# Allegro board pedal.brd
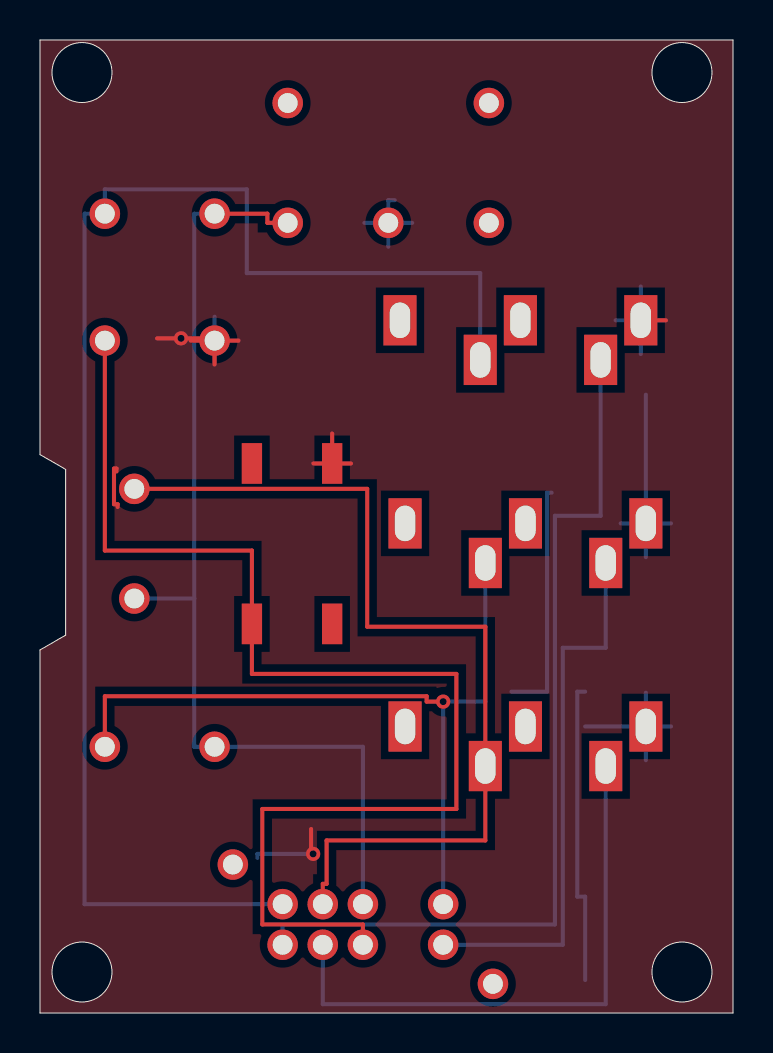
[diagram p0: board, top side]
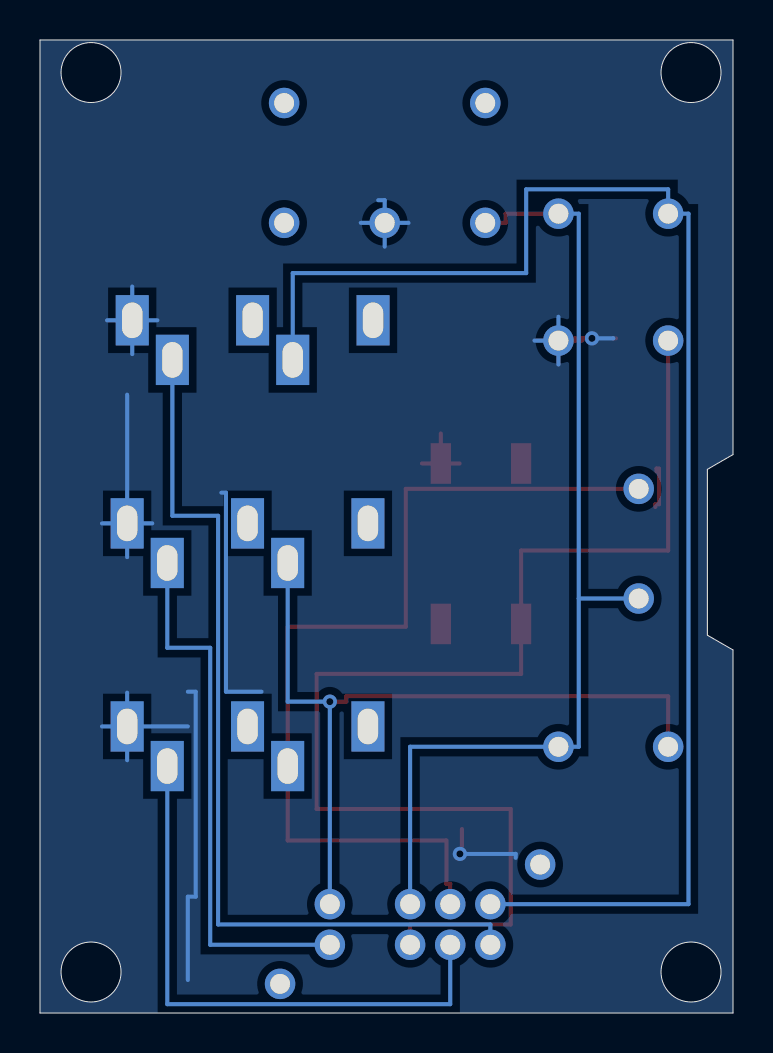
[diagram p1: board, bottom side, seen from below]

Outline 34.65 x 48.68 mm; copper layers: TOP, BOTTOM. Coordinates in mm from the lower left corner of the outline.
Outline path: circle c2.1,47.05 r1.5 ; circle c2.1,2.05 r1.5 ; circle c32.1,47.05 r1.5 ; circle c32.1,2.05 r1.5 ; 0,48.68 34.65,48.68 34.65,0 0,0 0,18.17 1.28,18.91 1.28,27.2 0,27.94 0,48.68

## Placement (name value [footprint] x y rotation side)
C52  104  [CAPCITA2P]  5.99 33.64 0 top
C53  104  [CAPCITA2P]  5.99 13.32 0 top
C54  104  [CAPCITA2P]  5.99 39.99 0 top
C55  104  [CAPCITA2P]  4.72 23.48 270 top
U1  switch_3b  [SWITCH_3P]  16.15 4.43 270 top
U2  pot_3pin  [PET_3P]  17.42 42.53 90 top
U3  aduio_3.5  [AUDIO_3]  24.27 23.48 270 top
U4  aduio_3.5  [AUDIO_3]  24.27 13.32 270 top
U5  aduio_3.5  [AUDIO_3]  24.02 33.64 270 top
U6  switch4p  [BUTOM4P]  12.6 23.48 90 top

## Library data of the parts
C52-C55 = CAP NP
U1 = switch_3b
U2 = pot_3pin
U3-U5 = aduio_3.5
U6 = switch4p

## Footprints (pads in the part's own frame, mm; a bottom-side part is the same pattern mirrored in y, then rotated)
AUDIO_3
  rect 2.515x1.651 hole 1.778x1.016: 1(-1.016,6.02) 2(-1.016,0) 3(-1.016,-6.02) 4(0.965,4.013) 5(0.965,-2.007)
BUTOM4P
  rect 2.032x1.016 smd: 1(-4.013,2.007) 2(-4.013,-2.007) 3(4.013,-2.007) 4(4.013,2.007)
CAPCITA2P
  round 1.524 hole 0.991: 1(-2.743,0) 2(2.743,0)
PET_3P
  round 1.524 hole 0.991: 1(-2.997,5.029) 2(-2.997,0) 3(-2.997,-5.029) 4(2.997,-5.029) 5(2.997,5.029)
SWITCH_3P
  round 1.524 hole 0.991: 1(-1.016,4.013) 2(-1.016,0) 3(-1.016,-2.007) 4(-1.016,-4.013) 5(1.016,-4.013) 6(1.016,-2.007) 7(1.016,0) 8(1.016,4.013) 9(-2.997,-6.502) 10(2.972,6.502)

## Nets
GND: C52.2 U2.2 U3.1 U4.1 U5.1 U6.3
N5176084: C53.1 U1.1 U3.5
N5176275: C53.2 C54.2 C55.2 U1.2 U2.1
N5176347: C55.1 U1.3 U4.5
N5176456: C54.1 U1.4 U5.5
N5176658: C52.1 U1.7 U6.1
N5176741: U1.8 U3.4
N5176773: U1.6 U4.4
N5176791: U1.5 U5.4

Pads without a net: U1 9 10; U2 3 4 5; U3 2 3; U4 2 3; U5 2 3; U6 2 4

## Via types
v1: diameter 0.711, hole 0.356, TOP to BOTTOM, 3 vias

## Routing (per net, layer and track width the routed paths; a pad name or vN(x,y) marks a point on that pad's centre or on a via; arc(x,y) is an arc through that point)
GND: length 79
  TOP w0.203: 5.85,33.75 v1(7.05,33.75) 8.73,33.75 C52.2 ; C52.2 9.92,33.64 ; C52.2 7.53,33.64 ; C52.2 8.73,32.45 ; 31.3,34.66 U5.1 ; 3.88,25.32 3.88,25.45 3.7,25.45 3.7,27.24 3.82,27.24 3.82,27.1 ; v1(13.66,7.96) 13.55,7.96 13.55,9.21 ; U6.3 15.55,27.49 ; U6.3 14.61,28.99 ; U6.3 13.67,27.49
  BOTTOM w0.203: v1(7.05,33.75) 5.99,33.75 5.99,33.76 ; 30.29,12.65 U4.1 ; U4.1 30.29,16.03 ; U4.1 31.55,14.34 ; U4.1 27.26,14.34 ; v1(13.66,7.96) 10.87,7.96 10.87,7.76 ; 23.58,16.08 25.35,16.08 25.35,26.03 25.58,26.03 ; U5.1 30.04,36.35 ; U5.1 28.78,34.66 ; U5.1 31.3,34.66 ; U5.1 30.04,32.97 ; U2.2 17.42,40.67 17.74,40.67 ; U2.2 17.42,38.34 ; U2.2 16.22,39.53 ; U2.2 18.61,39.53 ; 27.26,16.08 26.87,16.08 26.87,5.82 27.26,5.82 27.26,1.65 ; 29.04,24.5 U3.1 ; U3.1 31.55,24.5 ; U3.1 30.29,30.94 ; U3.1 30.29,22.81 ; C52.2 9.92,33.64 ; C52.2 8.73,32.45 ; C52.2 8.73,34.84
N5176084: length 38.9
  TOP w0.203: v1(20.16,15.58) 19.33,15.58 19.33,15.85 3.24,15.85 C53.1
  BOTTOM w0.203: U3.5 22.27,15.58 v1(20.16,15.58) U1.1
N5176275: length 51.1
  TOP w0.203: C54.2 11.37,39.99 11.37,39.53 U2.1
  BOTTOM w0.203: 7.71,20.74 7.71,13.32 C53.2 16.15,13.32 U1.2 ; 7.71,20.74 C55.2 ; 7.71,20.74 7.71,39.99 C54.2
N5176347: length 46.5
  TOP w0.203: C55.1 16.36,26.22 16.36,19.33 22.27,19.33 U4.5 22.27,8.63 14.33,8.63 14.33,6.46 14.14,6.46 U1.3
N5176456: length 74
  BOTTOM w0.203: U5.5 22.01,37.02 10.34,37.02 10.34,41.21 3.24,41.21 C54.1 2.23,39.99 2.23,5.45 U1.4
N5176658: length 62.5
  TOP w0.203: 16.15,3.41 16.15,4.43 11.12,4.43 11.12,10.21 20.82,10.21 20.82,16.97 10.6,16.97 U6.1 10.6,23.14 3.24,23.14 C52.1
N5176741: length 27.2
  BOTTOM w0.203: 20.16,3.41 26.14,3.41 26.14,18.27 28.29,18.27 U3.4
N5176773: length 29
  BOTTOM w0.203: U4.4 28.29,0.44 14.14,0.44 14.14,3.41
N5176791: length 45.2
  BOTTOM w0.203: U5.4 28.03,24.88 25.75,24.88 25.75,4.43 12.13,4.43 U1.5

## Copper pours and planes (outline as drawn; the poured copper is in the pictures)
GND on TOP, BOTTOM: 0,0 0,18.17 1.28,18.91 1.28,27.2 0,27.94 0,48.68 34.65,48.68 34.65,0

## Text on the board
NCLEGEND-1-2: FIGURE | SIZE | 14.0 | 39.0 | 70.0x40.0 | DRILL CHART: TOP to BOTTOM | ALL UNITS ARE IN MILS | PLATED | QTY | 3 | 23 | 15
NCLEGEND-1-1: FIGURE | SIZE | 65.0x30.0 | DRILL CHART: TOP to TOP | ALL UNITS ARE IN MILS | PLATED | QTY | 4
